# Altium PCB Mosfet_Driver_Circuit.PcbDoc
Units mm, origin at the board's own origin, x right, y up, seen from the top; angles counter-clockwise.
Board outline 86.8 x 73.5 mm, 2 copper layers (Top Layer, Bottom Layer); 44 components, 20 nets, 136 pads, 660 vias.
Unrouted connection lines stored in the file: 66.
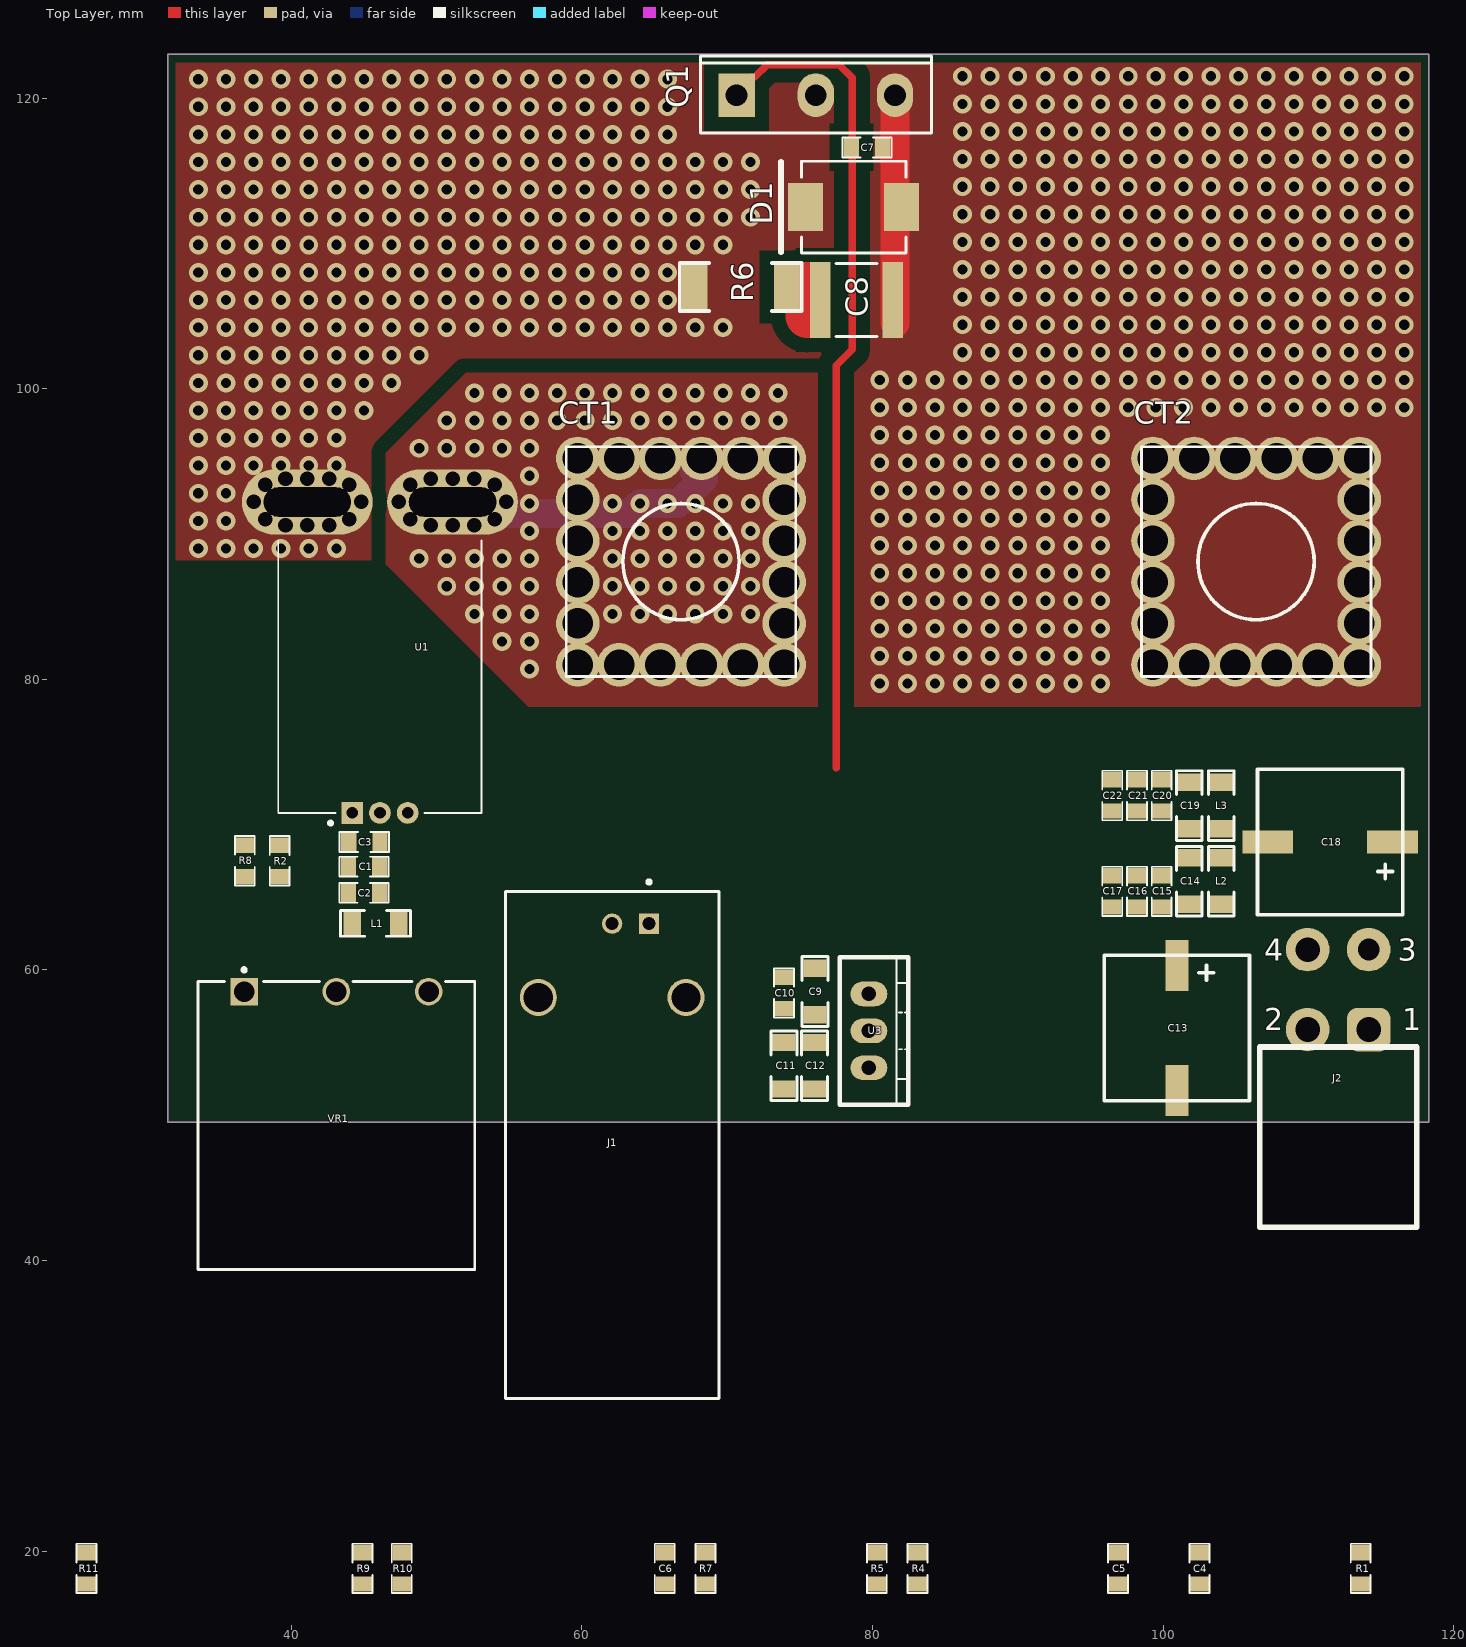
[diagram p0: Top Layer view]
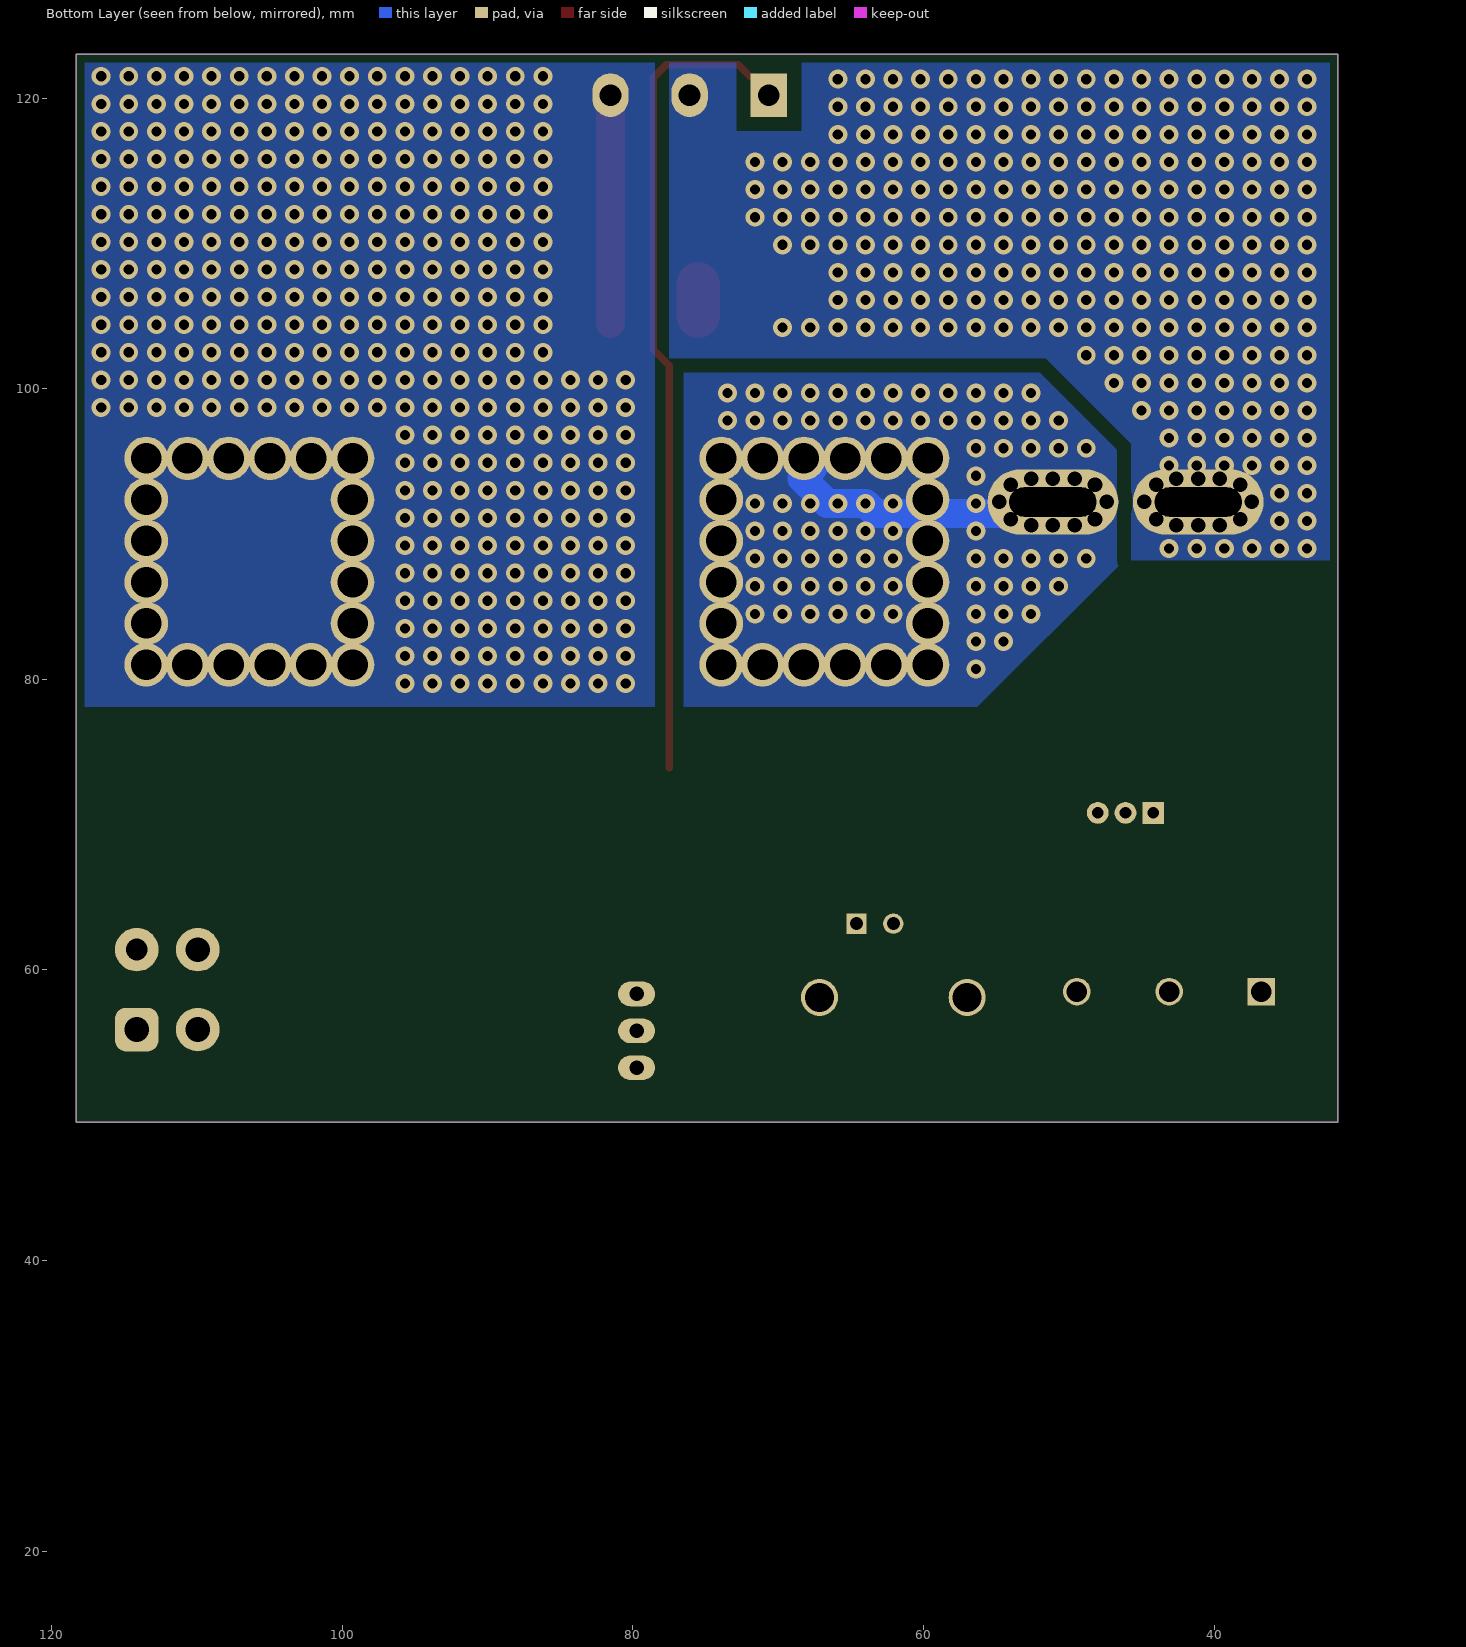
[diagram p1: Bottom Layer view, seen from below]

## Layer stack, top to bottom
Top Solder: solder mask 0.0102, Solder Resist, Dk 3.5
Top Layer: signal copper 0.0356
Dielectric 1: dielectric 0.32, FR-4, Dk 4.8
Bottom Layer: signal copper 0.0356
Bottom Solder: solder mask 0.0102, Solder Resist, Dk 3.5

## Board outline
31.5,49.5 31.5,123 118.3,123 118.3,49.5

## Design rules (kind name [scope] priority, off if disabled: settings)
Clearance Keep-Poly [(OnLayer('Keep-Out Layer')) vs (InPoly)] p1: gap=0.5 ignorepadtopadclearanceinfootprint=FALSE
Clearance Polygon [All vs (InPoly)] p2: gap=1 ignorepadtopadclearanceinfootprint=FALSE
Clearance Keepout [All vs (OnLayer('Keep-Out Layer'))] p3: gap=0.5 ignorepadtopadclearanceinfootprint=FALSE
Clearance [All] p4: gap=0.2 ignorepadtopadclearanceinfootprint=FALSE
ComponentClearance [All] p1: gap=0.1 collisioncheckmode=3 verticalgap=0.2 showdistances=FALSE
FabricationTestPointUsage TestPointUsage [All] p1: valid=0 allowmultiple=FALSE
FabricationTestpoint Testpoint [All] p1: side=3 testpointundercomponent=TRUE minsize=1.016 maxsize=2.54 preferedsize=1.524 minholesize=0 maxholesize=1.016 preferedholesize=0.813 testpointgrid=0.025 allowsidetop=TRUE allowsidebottom=TRUE usegrid=TRUE gridtolerance=0
HoleSize [All] p1: absolutevalues=TRUE maxlimit=3.5 minlimit=0 maxpercent=80.000 minpercent=20.000
PlaneClearance [All] p1: clearance=1
PlaneConnect [All] p1: planeconnectstyle=Direct reliefexpansion=0.508 reliefentries=4 reliefconductorwidth=0.254 reliefairgap=0.254
PolygonConnect PolygonConnect_1 [InNet('BAT+')] p1: connectstyle=Direct reliefconductorwidth=0.254 reliefentries=4 polygonreliefangle="90 Angle" airgapwidth=0.254
PolygonConnect [All] p2: connectstyle=Direct reliefconductorwidth=0.8 reliefentries=4 polygonreliefangle="90 Angle" airgapwidth=0.254
RoutingVias [All] p1: holewidth=0.3 width=0.6 viastyle="Through Hole" minholewidth=0.3 minwidth=0.6 maxholewidth=0.8 maxwidth=1.3
SolderMaskExpansion [(IsVia)] p1: expansion=-10 istentingtop=FALSE
Width SGND [InNet('SGND')] p1: maxlimit=2 minlimit=0.3 preferedwidth=0.5 minimp=50.000000 maximp=50.000000 favimp=50.000000
Width PGND [InNet('PGND')] p2: maxlimit=3 minlimit=0.5 preferedwidth=0.5 minimp=50.000000 maximp=50.000000 favimp=50.000000
Width [All] p3: maxlimit=2 minlimit=0.2 preferedwidth=0.2 minimp=50.000000 maximp=50.000000 favimp=50.000000
24 further rules are at their usual default settings.

## Components (designator, comment, footprint, x,y, rotation, side; value= is the part's Value field where it differs from the comment)
C1 "10pF C0G" 0805 45,67.101 r0 top
C2 "1nF X7R 50V" 0805 45,65.3 r0 top
C3 "100nF X7R 100V" 0805 45.025,68.8 r0 top
C4 "1nF X7R 50V" 0805 102.499,18.8 r90 top
C5 "100nF X7R 50V" 0805 96.899,18.8 r90 top
C6 "1nF X7R 50V" 0805 65.7,18.8 r90 top
C7 "1nF X7R 50V" 0805 79.625,116.6 r0 top
C8 "3.3uF X7R 250V" 2220 78.9,106.1 r0 top
C9 "10uF X7R 50V" 1206 76.05,58.5 r270 top
C10 "100nF X7R 100V" 0805 73.9,58.4 r270 top
C11 "10uF X7R 50V" 1206 73.9,53.4 r90 top
C12 "10uF X7R 50V" 1206 76,53.4 r90 top
C13 "220uF 50V" C_G55 100.95,56 r90 top
C14 "10uF X7R 50V" 1206 101.8,66.1 r90 top
C15 "100nF X7R 100V" 0805 99.9,65.4 r90 top
C16 "1nF X7R 50V" 0805 98.2,65.4 r90 top
C17 "10pF C0G" 0805 96.5,65.4 r90 top
C18 "220uF 50V" C_G55 111.5,68.8 r0 top
C19 "10uF X7R 50V" 1206 101.8,71.3 r90 top
C20 "100nF X7R 100V" 0805 99.9,72 r90 top
C21 "1nF X7R 50V" 0805 98.2,72 r90 top
C22 "10pF C0G" 0805 96.5,72 r90 top
CT1 "POWERPLUS F-M8" "PowerPlus M8" 66.82,88.1 r0 top
CT2 "POWERPLUS F-M8" "PowerPlus M8" 106.4,88.1 r0 top
D1 "SMCJ15A" LFUS-DO-214AB-2_V 78.7,112.5 r180 top
J1 "1-1337543-0" TECO-1-1337543-0_V 62.08,58.1 r180 top
J2 "M_FIT2X2_90°" M_FIT_JR2X2 112.05,58.641 r0 top
L1 "80R 3A" 1206 45.8,63.2 r180 top
L2 "80R 3A" 1206 104,66.1 r270 top
L3 "80R 3A" 1206 104,71.3 r90 top
Q1 "IXTK90N25L2" TO-247 76.1,120.2 r0 top
R1 "100R" 0805 113.599,18.8 r90 top
R2 "0R" 0805 39.2,67.5 r90 top
R4 "100R" 0805 83.099,18.8 r90 top
R5 "100R" 0805 80.299,18.8 r90 top
R6 "1R5" 2512 70.925,107 r0 top
R7 "47K" 0805 68.5,18.8 r90 top
R8 "0R" 0805 36.8,67.5 r270 top
R9 "NM" 0805 44.9,18.8 r90 top
R10 "0R" 0805 47.6,18.8 r90 top
R11 "0R" 0805 25.9,18.8 r90 top
U1 "ACS758" XDCR_ACS758 46.1,70.8 r0 top locked
U3 "LM7805CT" TO-220 79.75,55.8 r270 top
VR1 "3852A-282-103AL" BOUR-3852A-282-103AL-3_V 43.1,58.5 r0 top

## Footprints (in the part's own frame and the unit in brackets; to place one, negate y for a bottom-side part, rotate by r counter-clockwise, add the part's x,y. Pads: shape width x height; smd on the part's side, far side on the other; paste and mask are expansions set on the pad)
0805 [mm]
  rect 1.05x1.3 smd: 1(-1.075,0) 2(1.075,0)
  silkscreen extent -1.7,-0.69 1.7,0.69, body extent -1,-0.62 1,0.63, height 0.5
1206 [mm]
  rect 1.2x1.6 smd: 1(-1.6,0) 2(1.6,0)
  silkscreen extent -2.4,-0.89 2.4,0.89, body extent -1.6,-0.8 1.6,0.8, height 0.6
2220 [mm] "Chip Capacitor, Body 5.7x5.0mm, IPC High Density"
  rect 1.4x5.2 smd: 1(-2.5,0) 2(2.5,0)
  silkscreen extent -1.4,-2.5 1.4,2.5, body extent -2.95,-2.63 2.95,2.63, height 1.4
2512 [mil]
  rect 70x120 smd: 1(-125,0) 2(125,0)
  silkscreen extent -165,-65 165,65, body extent -134,-65 134,65, height 25
BOUR-3852A-282-103AL-3_V [mm] "TH, 3-Leads, Body 19.81x19.05mm, Pitch 6.35mm"
  rect 1.9x1.9 hole 1.4: 1(-6.35,0)
  round 1.9 hole 1.4: 2(0,0) 3(6.35,0)
  silkscreen extent -9.53,-19.11 9.52,1.62, body extent -9.52,-19.11 9.52,0.7, height 19.05
C_G55 [mm]
  rect 3.5x1.6 smd: 1(4.3,0) 2(-4.3,0)
  silkscreen extent -5,-5 5,5, body extent -5.8,-5.15 5.8,5.15, height 10.2
LFUS-DO-214AB-2_V [mm] "Molded Diode, 2-Leads, Body 7.11x6.22mm"
  rect 2.4x3.3 smd: 1(-3.3,0) 2(3.3,0)
  silkscreen extent -3.6,-3.15 5,3.15, body extent -3.77,-3.11 3.77,3.11, height 2.62
M_FIT_JR2X2 [mm]
  rrect50% 3x3 hole 1.7: 1(2.1,-2.75)
  round 3 hole 1.7: 2(-2.1,-2.75) 4(-2.1,2.75)
  round 3 hole 1.5: 3(2.1,2.75)
  silkscreen extent -5.4,-16.35 5.4,-3.95, body extent -5.4,-16.5 5.4,3.43, height 11.4
"PowerPlus M8" [mm] "PowerPlus con vite M8"
  round 3 hole 2.1: 1(-7.1,-7.1) 1(-7.1,-4.26) 1(-7.1,-1.42) 1(-7.1,1.42) 1(-7.1,4.26) 1(-7.1,7.1) 1(-4.26,-7.1) 1(-4.26,7.1) 1(-1.42,-7.1) 1(-1.42,7.1) 1(1.42,-7.1) 1(1.42,7.1) 1(4.26,-7.1) 1(4.26,7.1) 1(7.1,-7.1) 1(7.1,-7.1) 1(7.1,-4.26) 1(7.1,-1.42) 1(7.1,1.42) 1(7.1,4.26) 1(7.1,7.1)
  silkscreen extent -7.9,-7.9 7.9,7.9, body extent -7.9,-7.7 7.92,7.7, height 12
TECO-1-1337543-0_V [mm] "SMD, 2-Leads, Body 34.9x14.7mm, Pitch 2.54mm"
  rect 1.4x1.4 hole 0.89: 1(-2.54,-5.08)
  round 1.4 hole 0.89: 2(0,-5.08)
  round 2.55 hole 2.01: MH1(-5.08,0) MH2(5.08,0)
  silkscreen extent -7.35,-8.07 7.35,27.6, body extent -7.35,-7.1 7.35,28.05, height 15.8
TO-220 [mm]
  oval 1.7x2.54 hole 1: 1(-2.54,0) 2(0,0) 3(2.54,0)
  silkscreen extent -5.08,-2 5.08,2.7, body extent -4.95,-2.1 4.95,2.4, height 20.8
TO-247 [mm] "SIP with Mounting Hole; 3 Leads; Body 20 x 15.6 x 5 mm (typ); Pitch 5.45 mm"
  rect 2.5x3 hole 1.5: 1(-5.45,0)
  oval 2.5x3 hole 1.5: 2(0,0) 3(5.45,0)
  silkscreen extent -7.95,-2.6 7.95,2.7, body extent -7.62,-2.5 7.62,2.07, height 23.83
XDCR_ACS758 [mm]
  rect 1.5x1.5 hole 0.8: 1(-1.91,0)
  round 1.5 hole 0.8: 2(0,0) 3(1.91,0)
  oval 9x4.5 hole 2 slot 6 at 0 deg: 4(5,21.4) 5(-5,21.4)
  silkscreen extent -7,-0.82 7,18.76

## Part data
C1 C17 C22: library part "CAP_10pF C0G_0805", "Capacità", ArSilicii Part Number=CPC0614010, 1 Supplier Unit Price=0,09, SMD/TH=SMD
C2 C4 C6 C7 C16 C21: library part "CAP_1nF X7R 50V_0805", "Capacità", 1 Supplier Part Number=B37941K5102K60, 2 Supplier Part Number=0805B102K5CT, ArSilicii Part Number=CPC0213001, Manufacturer="EPCOS / TDK", 1 Supplier="DISTAR S.R.L.", 1 Supplier Unit Price=0,00235, 2 Supplier="ARROW ELECTRONICS ITALIA S.R.L.", Manufacturer Part Number=B37941K5102K60, SMD/TH=SMD
C3 C10 C15 C20: library part "CAP_100nF X7R 100V_0805", "Capacità", 1 Supplier Part Number=CL21B104KCFSFNG, 2 Supplier Part Number=1907331, ArSilicii Part Number=CPC0213101, Manufacturer=SAMSUNG, 1 Supplier="ARROW ELECTRONICS ITALIA S.R.L.", 2 Supplier="FARNELL ITALIA S.R.L.", Manufacturer Part Number=CL21B104KCFSFNG, SMD/TH=SMD
C5: library part "CAP_100nF X7R 50V_0805", "Capacità", 1 Supplier Part Number=C0805C104K5RAC7800, 2 Supplier Part Number="08055C104KAT2A AVX", ArSilicii Part Number=CPC0213100, Manufacturer=Kemet, 1 Supplier="ARROW ELECTRONICS ITALIA S.R.L.", 1 Supplier Unit Price=0,00240, 2 Supplier="AVNET EMG ITALY S.R.L.", Manufacturer Part Number=C0805C104K5RAC7800, SMD/TH=SMD
C8: library part "CAP_1uF X7R 250V_2220", "Capacità", 1 Supplier Part Number=2435506, 2 Supplier Part Number=810-CGA9N3X7R2E105K, Manufacturer=TDK, Manufacturer Part Number=CGA9N3X7R2E105K230KA, 1 Supplier="FARNELL ITALIA S.R.L.", 1 Supplier Unit Price=0,606, 2 Supplier=MOUSER, 2 Supplier Unit Price=0,594, SMD/TH=SMD
C9 C11 C12 C14 C19: library part "CAP_10uF X7R 50V_1206", "Capacità", 1 Supplier Part Number=CL31B106KBHNNNE, ArSilicii Part Number=CPC0232011, 1 Supplier="ARROW ELECTRONICS ITALIA S.R.L.", ComponentLink1Description="Datasheet for 10uF X7R 25V", Manufacturer Part Number=CL31B106KBHNNNE, SMD/TH=SMD
C13 C18: library part "CAP_EL_220uF 50V", "Capacità polarizzata", 2 Supplier Part Number=5194346, ArSilicii Part Number=CPC0402221, Manufacturer=Nichicon, Manufacturer Part Number=UPS1H221MPD, 1 Supplier="ARROW ELECTRONICS ITALIA S.R.L.", 1 Supplier Unit Price=0,04516, 2 Supplier="RS COMPONENTS S.P.A.", ComponentLink1Description="Datasheet for 220uF 50V", ComponentLink1URL=http://docs-europe.electrocomponents.com/webdocs/0649/0900766b8064973a.pdf, SMD/TH=TH
CT1 CT2: library part "PAD_POWERPLUS F-M8", "Singolo contatto", 1 Supplier Part Number=S98978, ArSilicii Part Number=QC04000180, Manufacturer=WURTH, Manufacturer Part Number=93517, 1 Supplier="Würth Elektronik ICS GmbH & Co. KG", SMD/TH=TH
D1: library part CMP-2000-07102-1, "Transient Voltage Suppression Diode, 15 V, -65 to 150 degC, 2-Pin DO-214AB (SMCJ), RoHS, Tape and Reel", Breakdown Voltage-Max=18.5V, Breakdown Voltage-Min=16.7V, Clamping Voltage-Max=24.4V, Manufacturer=Littelfuse, Package Description="2-Pin Surface Mount Device, Body 6.855 x 5.905 mm", Package Reference=DO-214AB, Power Dissipation=1500W, Datasheet URL=http://www.littelfuse.com/products/tvs-diodes/surface-mount/~/media/electronics/datasheets/tvs_diodes/littelfuse_tvs_diode_smcj_datasheet.pdf.pdf, Datasheet Version=11/2015, Directional=Uni-Directional, Manufacturer URL=http://www.littelfuse.com/, Mounting Technology=SurfaceMount
J1: library part CMP-2000-05853-1, "Female Connector, Pitch 2.54 mm, 1 x 2 Position, Height 15.8 mm, Tail Length 3.8 mm,  / -55 to 85 degC, RoHS, Bulk", Frequency Max=4GHz, Manufacturer="TE Connectivity", Package Description="Female Connector, Pitch 2.54 mm, 1 x 2 Position, Height 15.8 mm, Tail Length 3.8 mm", Coaxial Cable Types=-, Coaxial Termination=Solder, Connector Body Style=RightAngleJack, Connector Mounting=PCBMount, Connector Type=BNCCoaxial, Contact Material=Brass, Contact Plating=GoldPlatedContacts, Datasheet URL=http://www.te.com/commerce/DocumentDelivery/DDEController?Action=showdoc&DocId=Customer+Drawing%7F1337543%7FG%7Fpdf%7FEnglish%7FENG_CD_1337543_G.pdf%7F1-1337543-0, Datasheet Version="Rev. G, 12/2012", Impedance=50ohm, Manufacturer URL=http://www.te.com/, Mounting Technology=ThroughHole, Package Reference=1-1337543-0, Product Range=-, SVHC=ToBeAdvised
J2: "Mini Fit Junior 4 poli", 3 Supplier Part Number=C4255WR-2X2P, ArSilicii Part Number=QA02001000, Manufacturer=Molex, Manufacturer Part Number=87427-0403, 1 Supplier="ABACUS ECC S.R.L. - UNIPERSONALE", 1 Supplier Unit Price=0,10556, 2 Supplier="ELECTRO-LINE S.R.L.", 3 Supplier="SIRIO S.R.L.", ComponentLink1Description="Datasheet for M_FIT2X2_90°", ComponentLink1URL=http://datasheet.octopart.com/87427-0403-Molex-datasheet-13790610.pdf, SMD/TH=TH
L1 L2 L3: library part "Ferrite 80R 3A", "Ferrite", 1 Supplier Part Number=3275550P, ArSilicii Part Number=CPF0006000, Manufacturer="Wurth Elektronik", Manufacturer Part Number=74279215, Supplier Part Number 1=732-1629-1-ND, 1 Supplier="RS COMPONENTS S.P.A.", 1 Supplier Unit Price=0,21000, ComponentLink1Description="Datasheet for Ferrite 80R 3A", ComponentLink1URL=http://docs-europe.electrocomponents.com/webdocs/0033/0900766b80033a26.pdf, SMD/TH=SMD, Supplier 1=Digi-Key
Q1: "MOS CANALE N-250V-90A Linear", 1 Supplier Part Number=PB90N06S4-04, 2 Supplier Part Number=826-9042P, ArSilicii Part Number=CPTP200080, Manufacturer Part Number=IPB90N06S404ATMA2, 1 Supplier="EBV ELEKTRONIK S.R.L.", 1 Supplier Unit Price=0,56, 2 Supplier="RS COMPONENTS S.R.L.", SMD/TH=SMD
R1 R2 R4 R5 R6 R7 R8 R9 R10 R11: library part RES_SMD, "Resistenza", SMD/TH=SMD
U1: "Current Sensor 50A 1 Channel Hall Effect, Open Loop Unidirectional 5-CB Formed Leads, PFF", Package="5-CB-5 Allegro MicroSystems LLC", MF="Allegro MicroSystems LLC", MP=ACS758
U3: "Stabilizzatore 5Volt 7805", ArSilicii Part Number=IC01007010, Manufacturer="Fairchild Semiconductor", 1 Supplier="ARROW ELECTRONICS ITALIA S.R.L.", 1 Supplier Unit Price=0,085, ComponentLink1Description="Datasheet for LM7805CT", ComponentLink1URL=http://www.fairchildsemi.com/ds/LM/LM7805.pdf, Manufacturer Part Number=LM7805CT, SMD/TH=TH
VR1: library part CMP-2000-05079-1, "Diameter Panel Control, 10 KOhm, +/- 10%, 2 W, -1 to 125 degC, 3-Pin THD, RoHS, Bulk", Manufacturer=Bourns, Power (Watts)=2W, Resistance (Ohms)=10k, Resistive Material=Cermet, Standard Package=45, Temperature Coefficient=±150ppm/degC, Tolerance=±10%, Actuator Diameter="0.250\"(6.35mm)", Actuator Length="0.875\"(22.23mm)", Actuator Type=Slotted, Associated Product="36-8560-ND / -KNOBINSTRUMW/DIALRND.9\"DIA / 36-8555-ND / -KNOBINSTRUMSKIRTEDRND.7\"DIA / 36-8556-ND / -KNOBINSTRUMSKIRTEDRND.9\"DIA / 36-8565-ND / -KNOBINSTRUMDBLBARRND.7\"DIA / 36-8566-ND / -KNOBINSTRUMDBLBARRND.9\"DIA / 36-8568-ND / -KNOBINSTRUMSGLBARRND.7\"DIA / 36-8569-ND / -KNOBINSTRUMSGLBARRND.9\"DIA / 36-8559-ND / -KNOBINSTRUMW/DIALRND.7\"DIA / 226-1006-ND / -KNOBBLKGLOSS.75\"DIA.250\"SHAFT / 226-1007-ND / -KNOBBLKGLOSS.925\"DIA.250\"SHAFT / 226-1011-ND / -KNOBBLKGLOS", Built in Switch=None, Bushing Thread=3/8-32, Catalog Drawings="3852SeriesSide1 /  / 3852SeriesSide2", Category=Potentiometers,VariableResistors, Datasheet URL=https://datasheet.ciiva.com/11831/0900766b80f93b4b-11831016.pdf, Datasheet Version=Sep-14, Family=RotaryPotentiometers,Rheostats, Manufacturer URL=http://www.bourns.com/, Mounting Type=PanelMount, Number of Gangs=1, Number of Turns=1, Online Catalog=3852and3856Series, Other Names=3852A282103AL, Packaging=Bulk, PCN Design/Specification=PBTResinJun/2011, PCN Other=MultipleChanges01/Dec/2012, RoHS Information=3852A-LMaterialDeclaration, Rotation=280deg, Series=3852, Taper=Linear, Termination Style=SolderLug

## Via types
v1: diameter 1.3, hole 0.7, Top Layer to Bottom Layer, 636 vias
v2: diameter 1, hole 1, Top Layer to Bottom Layer, 24 vias

## Nets (pads, with @x,y where several pads share a name; then routed paths per layer and width w, separated by ;. In a path a pad name is that pad's centre, name@x,y a point inside that pad or via, vN(x,y) a via of type N, cw(c..) or ccw(c..) an arc to the next point about the centre after c; other vN are vias at no path point)
+5V0: C11.1 C12.1 L1.1 U3.3
+12V0: C9.1 C10.1 C13.1 J2.4 L2.1 U3.1
+F_5V0: C1.1 C2.1 C3.1 L1.2 R2.2 U1.1
+F_12V0: C14.1 C15.1 C16.1 C17.1 L2.2
-12V0: C18.2 J2.3 L3.1
-F_12V0: C19.2 C20.2 C21.2 C22.2 L3.2 R10.1
GND: C1.2 C2.2 C3.2 C4.2 C5.1 C7.2 C8.2 C9.2 C10.2 C11.2 C12.2 C13.2 C14.2 C15.2 C16.2 C17.2 C18.1 C19.1 C20.1 C21.1 C22.1 CT2.1 D1.1 J1.1 J1.MH1 J1.MH2 J2.1 J2.2 Q1.3 R7.2 R8.1 R9.1 U1.2 U3.2 | length 15.7
  Top Layer w2: C8.2@81.55,104.5 Q1.3
  other v1: 80.5,79.7 82.4,79.7 84.3,79.7 86.2,79.7 88.1,79.7 90,79.7 91.9,79.7 93.8,79.7 95.7,79.7 80.5,81.6 82.4,81.6 84.3,81.6 86.2,81.6 88.1,81.6 90,81.6 91.9,81.6 93.8,81.6 95.7,81.6 80.5,83.5 82.4,83.5 84.3,83.5 86.2,83.5 88.1,83.5 90,83.5 91.9,83.5 93.8,83.5 95.7,83.5 80.5,85.4 82.4,85.4 84.3,85.4 86.2,85.4 88.1,85.4 90,85.4 91.9,85.4 93.8,85.4 95.7,85.4 80.5,87.3 82.4,87.3 84.3,87.3 86.2,87.3 88.1,87.3 90,87.3 91.9,87.3 93.8,87.3 95.7,87.3 80.5,89.2 82.4,89.2 84.3,89.2 86.2,89.2 88.1,89.2 90,89.2 91.9,89.2 93.8,89.2 95.7,89.2 80.5,91.1 82.4,91.1 84.3,91.1 86.2,91.1 88.1,91.1 90,91.1 91.9,91.1 93.8,91.1 95.7,91.1 80.5,93 82.4,93 84.3,93 86.2,93 88.1,93 90,93 91.9,93 93.8,93 95.7,93 80.5,94.9 82.4,94.9 84.3,94.9 86.2,94.9 88.1,94.9 90,94.9 91.9,94.9 93.8,94.9 95.7,94.9 80.5,96.8 82.4,96.8 84.3,96.8 86.2,96.8 88.1,96.8 90,96.8 91.9,96.8 93.8,96.8 95.7,96.8 80.5,98.7 82.4,98.7 84.3,98.7 86.2,98.7 88.1,98.7 90,98.7 91.9,98.7 93.8,98.7 95.7,98.7 97.6,98.7 99.5,98.7 101.4,98.7 103.3,98.7 105.2,98.7 107.1,98.7 109,98.7 110.9,98.7 112.8,98.7 114.7,98.7 116.6,98.7 80.5,100.6 82.4,100.6 84.3,100.6 86.2,100.6 88.1,100.6 90,100.6 91.9,100.6 93.8,100.6 95.7,100.6 97.6,100.6 99.5,100.6 101.4,100.6 103.3,100.6 105.2,100.6 107.1,100.6 109,100.6 110.9,100.6 112.8,100.6 114.7,100.6 116.6,100.6 86.2,102.5 88.1,102.5 90,102.5 91.9,102.5 93.8,102.5 95.7,102.5 97.6,102.5 99.5,102.5 101.4,102.5 103.3,102.5 105.2,102.5 107.1,102.5 109,102.5 110.9,102.5 112.8,102.5 114.7,102.5 116.6,102.5 86.2,104.4 88.1,104.4 90,104.4 91.9,104.4 93.8,104.4 95.7,104.4 97.6,104.4 99.5,104.4 101.4,104.4 103.3,104.4 105.2,104.4 107.1,104.4 109,104.4 110.9,104.4 112.8,104.4 114.7,104.4 116.6,104.4 86.2,106.3 88.1,106.3 90,106.3 91.9,106.3 93.8,106.3 95.7,106.3 97.6,106.3 99.5,106.3 101.4,106.3 103.3,106.3 105.2,106.3 107.1,106.3 109,106.3 110.9,106.3 112.8,106.3 114.7,106.3 116.6,106.3 86.2,108.2 88.1,108.2 90,108.2 91.9,108.2 93.8,108.2 95.7,108.2 97.6,108.2 99.5,108.2 101.4,108.2 103.3,108.2 105.2,108.2 107.1,108.2 109,108.2 110.9,108.2 112.8,108.2 114.7,108.2 116.6,108.2 86.2,110.1 88.1,110.1 90,110.1 91.9,110.1 93.8,110.1 95.7,110.1 97.6,110.1 99.5,110.1 101.4,110.1 103.3,110.1 105.2,110.1 107.1,110.1 109,110.1 110.9,110.1 112.8,110.1 114.7,110.1 116.6,110.1 86.2,112 88.1,112 90,112 91.9,112 93.8,112 95.7,112 97.6,112 99.5,112 101.4,112 103.3,112 105.2,112 107.1,112 109,112 110.9,112 112.8,112 114.7,112 116.6,112 86.2,113.9 88.1,113.9 90,113.9 91.9,113.9 93.8,113.9 95.7,113.9 97.6,113.9 99.5,113.9 101.4,113.9 103.3,113.9 105.2,113.9 107.1,113.9 109,113.9 110.9,113.9 112.8,113.9 114.7,113.9 116.6,113.9 86.2,115.8 88.1,115.8 90,115.8 91.9,115.8 93.8,115.8 95.7,115.8 97.6,115.8 99.5,115.8 101.4,115.8 103.3,115.8 105.2,115.8 107.1,115.8 109,115.8 110.9,115.8 112.8,115.8 114.7,115.8 116.6,115.8 86.2,117.7 88.1,117.7 90,117.7 91.9,117.7 93.8,117.7 95.7,117.7 97.6,117.7 99.5,117.7 101.4,117.7 103.3,117.7 105.2,117.7 107.1,117.7 109,117.7 110.9,117.7 112.8,117.7 114.7,117.7 116.6,117.7 86.2,119.6 88.1,119.6 90,119.6 91.9,119.6 93.8,119.6 95.7,119.6 97.6,119.6 99.5,119.6 101.4,119.6 103.3,119.6 105.2,119.6 107.1,119.6 109,119.6 110.9,119.6 112.8,119.6 114.7,119.6 116.6,119.6 86.2,121.5 88.1,121.5 90,121.5 91.9,121.5 93.8,121.5 95.7,121.5 97.6,121.5 99.5,121.5 101.4,121.5 103.3,121.5 105.2,121.5 107.1,121.5 109,121.5 110.9,121.5 112.8,121.5 114.7,121.5 116.6,121.5
Load_+: CT1.1 U1.4 | length 16.4
  Bottom Layer w2: U1.4@52.6,91.4 54.5,91.4 56.4,91.4 58.3,91.4 ; CT1.1@59.72,91.4 60.2,91.4 62.1,91.4 63.3,91.4 v1(64,92.1) v1(65.9,92.1) 66.628,92.1 67.214,92.686 68.35,93.822 CT1.1@67.606,94.566
  other v1: 56.4,80.7 54.5,82.6 56.4,82.6 52.6,84.5 54.5,84.5 56.4,84.5 62.1,84.5 64,84.5 65.9,84.5 67.8,84.5 67.8,84.5 69.7,84.5 69.7,84.5 71.6,84.5 50.7,86.4 52.6,86.4 54.5,86.4 56.4,86.4 62.1,86.4 64,86.4 65.9,86.4 67.8,86.4 69.7,86.4 71.6,86.4 48.8,88.3 50.7,88.3 52.6,88.3 54.5,88.3 56.4,88.3 62.1,88.3 64,88.3 65.9,88.3 67.8,88.3 69.7,88.3 71.6,88.3 56.4,90.2 62.1,90.2 64,90.2 65.9,90.2 67.8,90.2 69.7,90.2 71.6,90.2 56.4,92.1 62.1,92.1 67.8,92.1 69.7,92.1 71.6,92.1 56.4,94 48.8,95.9 50.7,95.9 52.6,95.9 54.5,95.9 56.4,95.9 50.7,97.8 52.6,97.8 54.5,97.8 56.4,97.8 58.3,97.8 60.2,97.8 62.1,97.8 64,97.8 65.9,97.8 67.8,97.8 69.7,97.8 71.6,97.8 73.5,97.8 52.6,99.7 54.5,99.7 56.4,99.7 58.3,99.7 60.2,99.7 62.1,99.7 64,99.7 65.9,99.7 67.8,99.7 69.7,99.7 71.6,99.7 73.5,99.7
  other v2: 49.6,90.6 51.1,90.6 52.6,90.6 48.2,91 54,91 47.4,92.2 54.8,92.2 48.2,93.4 54,93.4 49.6,93.8 51.1,93.8 52.6,93.8
NetC4_1: C4.1 R1.2 R11.2
NetC5_2: C5.2 R4.2
NetC6_1: C6.1 R5.1 R7.1
NetC6_2: C6.2 R11.1
NetC7_1: C7.1 Q1.1 R5.2 | length 58.4
  Top Layer w0.5: Q1.1 70.65,120.45 71.65,121.45 71.9,121.45 72.75,122.3 77.7,122.3 78.6,121.4 78.6,102.7 77.5,101.6 77.5,73.9
  Bottom Layer w0.5: Q1.1 Q1.1@71.4,119.45
NetC8_1: C8.1 R6.2 | length 2.2
  Top Layer w3: 75.5,105 75.5,106.1 75.5,107.2
NetD1_2: D1.2 Q1.2 R6.1 U1.5
  other v1: 33.6,89 35.5,89 37.4,89 39.3,89 41.2,89 43.1,89 33.6,90.9 35.5,90.9 33.6,92.8 35.5,92.8 33.6,94.7 35.5,94.7 37.4,94.7 39.3,94.7 41.2,94.7 43.1,94.7 33.6,96.6 35.5,96.6 37.4,96.6 39.3,96.6 41.2,96.6 43.1,96.6 33.6,98.5 35.5,98.5 37.4,98.5 39.3,98.5 41.2,98.5 43.1,98.5 45,98.5 33.6,100.4 35.5,100.4 37.4,100.4 39.3,100.4 41.2,100.4 43.1,100.4 45,100.4 46.9,100.4 33.6,102.3 35.5,102.3 37.4,102.3 39.3,102.3 41.2,102.3 43.1,102.3 45,102.3 46.9,102.3 48.8,102.3 33.6,104.2 35.5,104.2 37.4,104.2 39.3,104.2 41.2,104.2 43.1,104.2 45,104.2 46.9,104.2 48.8,104.2 50.7,104.2 52.6,104.2 54.5,104.2 56.4,104.2 58.3,104.2 60.2,104.2 62.1,104.2 64,104.2 65.9,104.2 67.8,104.2 69.7,104.2 33.6,106.1 35.5,106.1 37.4,106.1 39.3,106.1 41.2,106.1 43.1,106.1 45,106.1 46.9,106.1 48.8,106.1 50.7,106.1 52.6,106.1 54.5,106.1 56.4,106.1 58.3,106.1 60.2,106.1 62.1,106.1 64,106.1 65.9,106.1 33.6,108 35.5,108 37.4,108 39.3,108 41.2,108 43.1,108 45,108 46.9,108 48.8,108 50.7,108 52.6,108 54.5,108 56.4,108 58.3,108 60.2,108 62.1,108 64,108 65.9,108 33.6,109.9 35.5,109.9 37.4,109.9 39.3,109.9 41.2,109.9 43.1,109.9 45,109.9 46.9,109.9 48.8,109.9 50.7,109.9 52.6,109.9 54.5,109.9 56.4,109.9 58.3,109.9 60.2,109.9 62.1,109.9 64,109.9 65.9,109.9 67.8,109.9 69.7,109.9 33.6,111.8 35.5,111.8 37.4,111.8 39.3,111.8 41.2,111.8 43.1,111.8 45,111.8 46.9,111.8 48.8,111.8 50.7,111.8 52.6,111.8 54.5,111.8 56.4,111.8 58.3,111.8 60.2,111.8 62.1,111.8 64,111.8 65.9,111.8 67.8,111.8 69.7,111.8 71.6,111.8 33.6,113.7 35.5,113.7 37.4,113.7 39.3,113.7 41.2,113.7 43.1,113.7 45,113.7 46.9,113.7 48.8,113.7 50.7,113.7 52.6,113.7 54.5,113.7 56.4,113.7 58.3,113.7 60.2,113.7 62.1,113.7 64,113.7 65.9,113.7 67.8,113.7 69.7,113.7 71.6,113.7 33.6,115.6 35.5,115.6 37.4,115.6 39.3,115.6 41.2,115.6 43.1,115.6 45,115.6 46.9,115.6 48.8,115.6 50.7,115.6 52.6,115.6 54.5,115.6 56.4,115.6 58.3,115.6 60.2,115.6 62.1,115.6 64,115.6 65.9,115.6 67.8,115.6 69.7,115.6 71.6,115.6 33.6,117.5 35.5,117.5 37.4,117.5 39.3,117.5 41.2,117.5 43.1,117.5 45,117.5 46.9,117.5 48.8,117.5 50.7,117.5 52.6,117.5 54.5,117.5 56.4,117.5 58.3,117.5 60.2,117.5 62.1,117.5 64,117.5 65.9,117.5 33.6,119.4 35.5,119.4 37.4,119.4 39.3,119.4 41.2,119.4 43.1,119.4 45,119.4 46.9,119.4 48.8,119.4 50.7,119.4 52.6,119.4 54.5,119.4 56.4,119.4 58.3,119.4 60.2,119.4 62.1,119.4 64,119.4 65.9,119.4 33.6,121.3 35.5,121.3 37.4,121.3 39.3,121.3 41.2,121.3 43.1,121.3 45,121.3 46.9,121.3 48.8,121.3 50.7,121.3 52.6,121.3 54.5,121.3 56.4,121.3 58.3,121.3 60.2,121.3 62.1,121.3 64,121.3 65.9,121.3
  other v2: 39.6,90.6 41.1,90.6 42.6,90.6 38.2,91 44,91 37.4,92.2 44.8,92.2 38.2,93.4 44,93.4 39.6,93.8 41.1,93.8 42.6,93.8
NetJ1_2: J1.2 R4.1 VR1.2
NetR1_1: R1.1 U1.3
NetR2_1: R2.1 VR1.3
NetR8_2: R8.2 VR1.1
NetR9_2: R9.2 R10.2

## Polygon pours and split planes (outlines as drawn)
NetD1_2 on Bottom Layer "NONET_L-01_P-001" (solid, pour order 20): 35.9,88.2 45.7,88.2 45.7,96.2 51.6,102.1 78.5,102.1 78.5,123 31.5,123 31.5,93.6 31.5,88.2
Load_+ on Bottom Layer "NONET_L-01_P-001" (solid, pour order 21): 46.5,87.9 56.3,78.1 61.35,78.1 76.5,78.1 76.5,101.1 52,101.1 46.5,95.6
GND on Bottom Layer "NONET_L-01_P-001" (solid, pour order 18): 78.5,123 78.5,78.1 118.3,78.1 118.3,123 78.5,123
no net on Bottom Layer "NONET_L-01_P-001" (solid, pour order 1): 87.2,98
NetD1_2 on Top Layer "NONET_L-01_P-001" (solid, pour order 22): 35.9,88.2 45.7,88.2 45.7,96.2 50.6,101.1 78.5,101.1 78.5,123 31.5,123 31.5,93.6 31.5,88.2
GND on Top Layer "NONET_L-01_P-001" (solid, pour order 19): 78.5,123 78.5,78.1 118.3,78.1 118.3,123 78.5,123
Load_+ on Top Layer "NONET_L-01_P-001" (solid, pour order 14): 46.5,87.9 56.3,78.1 61.35,78.1 76.5,78.1 76.5,101.1 52,101.1 46.5,95.6

## Keep-outs
Keep-Out Layer:
  the board outline again, w0.1

## Text inside footprints (layer, text, board x,y; h text height)
J2: Top Overlay "4" at 106.95,60.641 h1.5; Top Overlay "2" at 106.95,55.841 h1.5; Top Overlay "3" at 116.15,60.641 h1.5; Top Overlay "1" at 116.45,55.841 h1.5